# Altium PCB FPC-v4.0.PcbDoc
Units mil, origin at the board's own origin, x right, y up, seen from the top; angles counter-clockwise.
Board outline 1990.14 x 1043.31 mil, 2 copper layers (Top Layer, Bottom Layer); 1 components, 6 nets, 16 pads, 2 vias.
Unrouted connection lines stored in the file: 2.
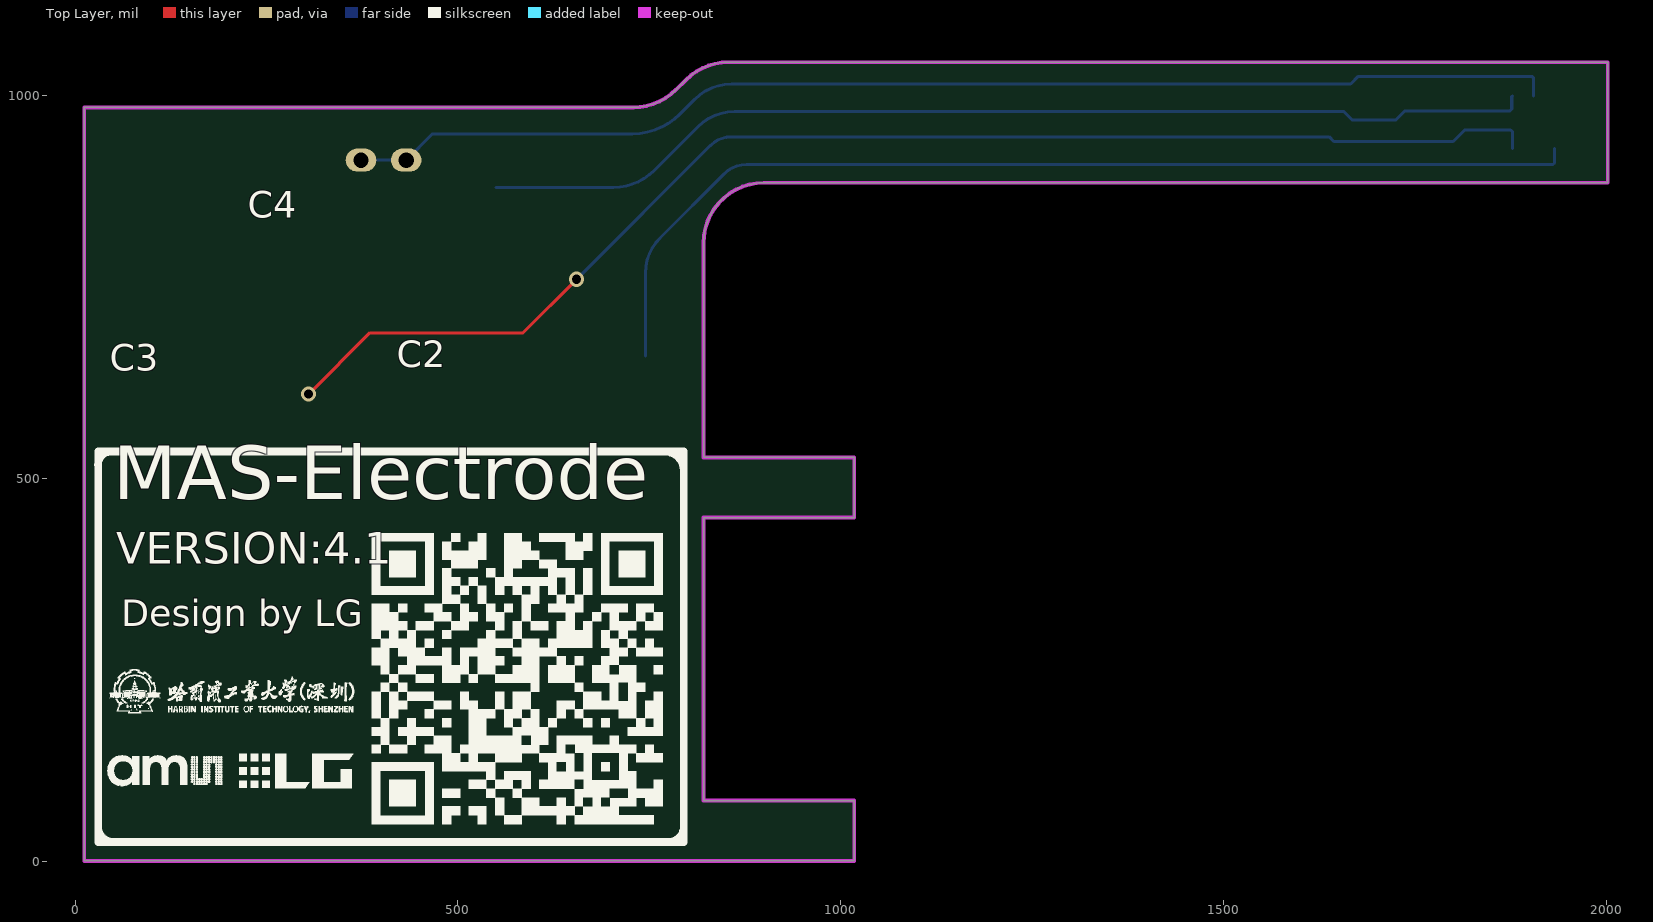
[diagram p0: Top Layer view]
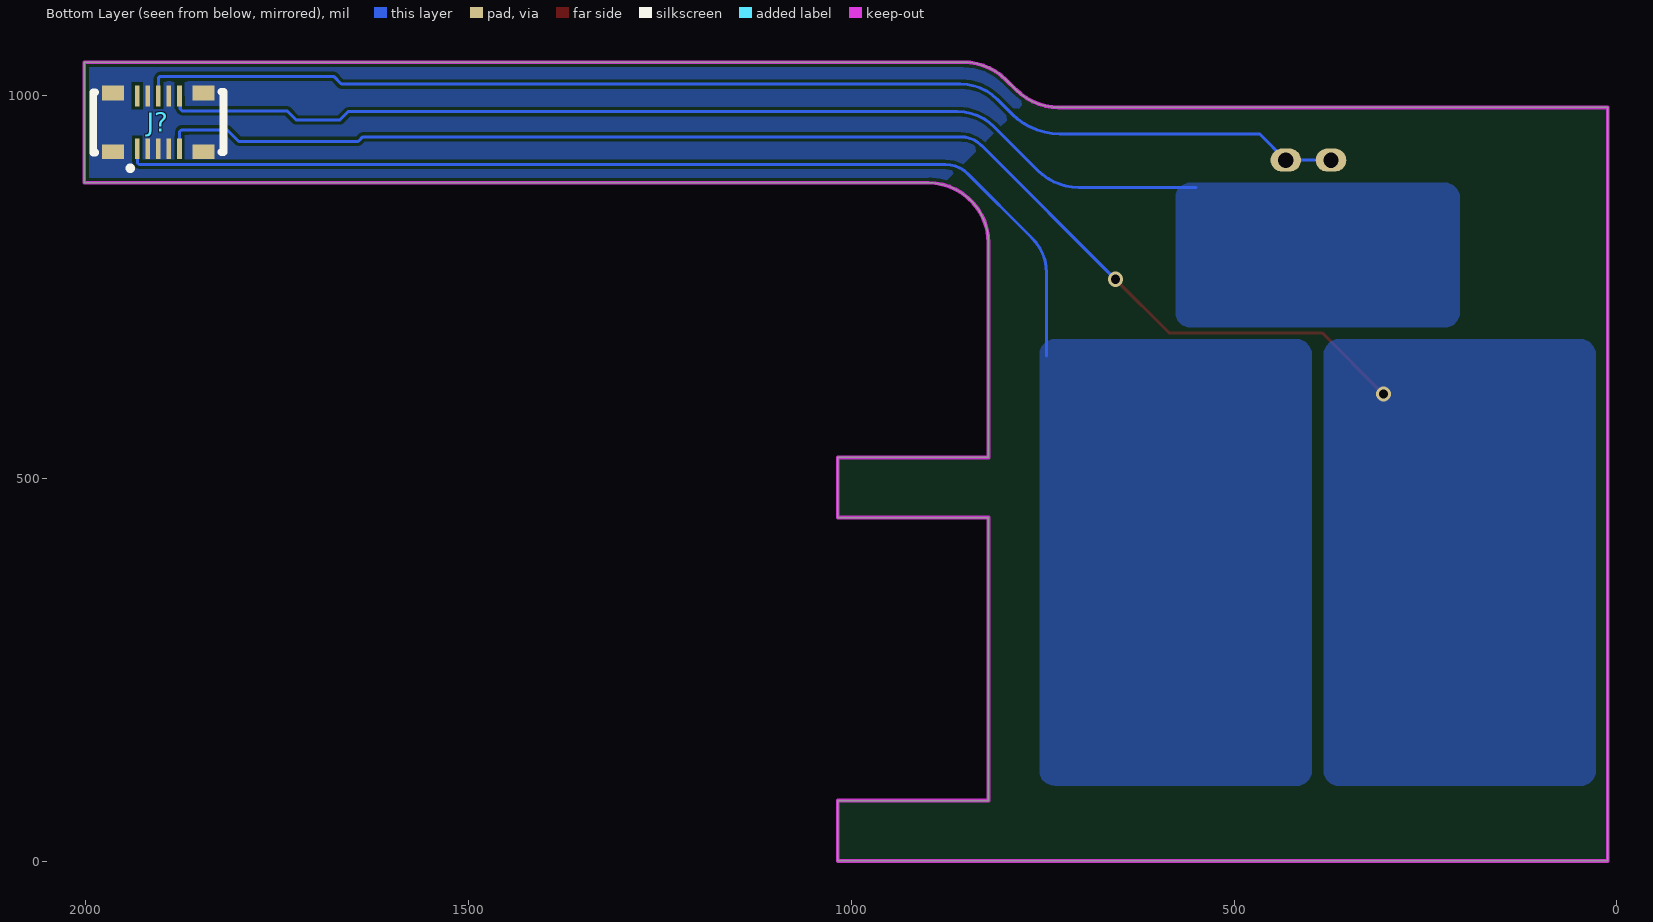
[diagram p1: Bottom Layer view, seen from below]

## Layer stack, top to bottom
Top Solder: solder mask 0.4, Solder Resist, Dk 3.5
Top Layer: signal copper 1.4
Dielectric 1: dielectric 12.6, FR-4, Dk 4.8
Bottom Layer: signal copper 1.4
Bottom Solder: solder mask 0.4, Solder Resist, Dk 3.5

## Board outline
11.81,0.25 1017.7,0.25 1017.7,78.99 820.85,78.99 820.85,448.65 1017.7,448.65 1017.7,527.39 820.85,527.39 820.85,807.34 cw(c899.59,807.34) 899.59,886.08 2001.95,886.08 2001.95,1043.56 853.47,1043.56 ccw(c853.47,964.82) 797.79,1020.49 784.86,1007.56 cw(c729.18,1063.24) 729.18,984.5 11.81,984.5

## Design rules (kind name [scope] priority, off if disabled: settings)
Clearance [All] p1: gap=4 ignorepadtopadclearanceinfootprint=FALSE except(6: Arc-THPad Track-THPad SMDPad-THPad THPad-THPad THPad-Fill THPad-Poly THPad-Region)
PlaneConnect [All] p1: planeconnectstyle=Direct reliefexpansion=20 reliefentries=4 reliefconductorwidth=10 reliefairgap=10
PolygonConnect [All] p1: connectstyle=Direct reliefconductorwidth=10 reliefentries=4 polygonreliefangle="90 Angle" airgapwidth=10
RoutingVias [All] p1: holewidth=11.81 width=19.68 viastyle="Through Hole" minholewidth=11.81 minwidth=19.68 maxholewidth=11.81 maxwidth=19.68
SolderMaskExpansion [All] p1: expansion=4 istentingtop=FALSE
Width [All] p1: maxlimit=10 minlimit=3 preferedwidth=4
29 further rules are at their usual default settings.

## Components (designator, comment, footprint, x,y, rotation, side; value= is the part's Value field where it differs from the comment)
J? "BM24-10DP/2-0.35V(51)" CONN-SMD_BM24-10DP-2-0.35V-51 1905,965 r180 bottom

## Footprints (in the part's own frame and the unit in brackets; to place one, negate y for a bottom-side part, rotate by r counter-clockwise, add the part's x,y. Pads: shape width x height; smd on the part's side, far side on the other; paste and mask are expansions set on the pad)
CONN-SMD_BM24-10DP-2-0.35V-51 [mm] "板对板连接器"
  rect 0.15x0.69 smd: 1(-0.7,-0.875) 2(-0.35,-0.875) 3(0,-0.875) 4(0.35,-0.875) 5(0.7,-0.875) 6(0.7,0.875) 7(0.35,0.875) 8(0,0.875) 9(-0.35,0.875) 10(-0.7,0.875)
  rect 0.73x0.49 smd: 11(1.5,0.975) 12(1.5,-0.975) 13(-1.5,-0.975) 14(-1.5,0.975)
  silkscreen extent -2.16,-1.55 2.16,1.02, body extent -2.17,-1 2.15,1.02, height 0.64

## Part data
J?: "板对板连接器", Current Rating (Max)=5A, JLCPCB Part Class="Extended Part", LCSC Part Name=BTB板对板,BM24系列,0.35间距,10PIN公座, Manufacturer=HRS(广濑), Operating Temperature Range=-40℃~+85℃, Add into BOM=yes, Convert to PCB=yes, Device=BM24-10DP/2-0.35V(51), Gender=公, Manufacturer Part=BM24-10DP/2-0.35V(51), Mounting Style=立贴, Name=BM24-10DP/2-0.35V(51), Number of Pins=10, Number of Rows=2, Pitch=0.35mm, Supplier=LCSC, Supplier Footprint=SMD,P=0.35mm, Supplier Part=C424554, Symbol=BM24-10DP/2-0.35V(51)

## Free pads (board coordinates)
  oval 40x30 hole 20: 1(373.4,915.6) 1(432.46,915.6)

## Via types
v1: diameter 19.68, hole 11.81, Top Layer to Bottom Layer, tented both sides, 2 vias

## Nets (pads, with @x,y where several pads share a name; then routed paths per layer and width w, separated by ;. In a path a pad name is that pad's centre, name@x,y a point inside that pad or via, vN(x,y) a via of type N, cw(c..) or ccw(c..) an arc to the next point about the centre after c; other vN are vias at no path point)
C1: J?.10
C2: J?.1 | length 1384.8
  Bottom Layer w4: 745,660 745,768.13 cw(c809.87,768.13) 764,814 847.98,897.98 cw(c877,868.96) 877,910 1930.21,910 1932.56,912.34 J?.1
C3: J?.5 | length 1741.7
  Top Layer w4: v1(305,610) 385,690 585,690 v1(655,760)
  Bottom Layer w4: v1(655,760) 829.65,934.65 cw(c857.05,907.24) 857.05,946 1638,946 1644,940 1800,940 1815,955 1875.09,955 1877.43,952.66 J?.5
C4: J?.6 | length 1389.4
  Bottom Layer w4: 550,880 703.2,880 ccw(c703.2,954.8) 756.08,901.89 813.52,959.34 cw(c861,911.85) 861,979 1657,979 1668,968 1725,968 1737,980 1874.14,980 1876.48,982.34 1876.48,998.5 J?.6
GND: J?.8 pad.1 | length 1594.4
  Bottom Layer w4: pad.1@373.4,915.6 432.46,915.6 466.85,950 728,950 ccw(c728,1037.36) 789.74,975.56 ; 789.77,975.59 809.48,995.29 cw(c857.05,947.72) 857.05,1015 1666,1015 1676,1025 1902.65,1025 1904.99,1022.66 J?.8
GP: J?.2 J?.3 J?.4 J?.7 J?.9 J?.11 J?.12 J?.13 J?.14

## Polygon pours and split planes (outlines as drawn)
GP on Bottom Layer "NONET_L01_P-001" (solid, pour order 11): 2003,885 2005,887 2005,1048 820,1048 768.15,996.15 877.3,887 960,887
C2 on Bottom Layer "NONET_L01_P-001" (solid, pour order 5): 398.61,118.36 398.61,661.67 cw(c418.3,661.67) 418.3,681.35 734.24,681.35 cw(c734.24,661.67) 753.92,661.67 753.92,118.36 cw(c734.24,118.36) 734.24,98.68 418.3,98.68 cw(c418.3,118.36)
C3 on Bottom Layer "NONET_L01_P-001" (solid, pour order 4): 47.24,98.68 cw(c47.24,118.36) 27.56,118.36 27.56,661.67 cw(c47.24,661.67) 47.24,681.35 363.18,681.35 cw(c363.18,661.67) 382.87,661.67 382.87,118.36 cw(c363.18,118.36) 363.18,98.68
C4 on Bottom Layer "NONET_L01_P-001" (solid, pour order 3): 224.9,697.1 cw(c224.9,716.79) 205.21,716.79 205.21,866.39 cw(c224.9,866.39) 224.9,886.08 556.58,886.08 cw(c556.58,866.39) 576.27,866.39 576.27,716.79 cw(c556.58,716.79) 556.58,697.1

## Keep-outs
Keep-Out Layer:
  lines w5: 11.81,0.25 820.85,0.25 1017.7,0.25 1017.7,78.99 820.85,78.99 820.85,448.65 1017.7,448.65 1017.7,527.39 820.85,527.39 820.85,807.34 cw(c899.59,807.34) 899.59,886.08 1844.47,886.08 2001.95,886.08 2001.95,1043.56 1844.47,1043.56 853.47,1043.56 ccw(c853.47,964.82) 797.79,1020.49 784.86,1007.56 cw(c729.18,1063.24) 729.18,984.5 663.37,984.5 11.81,984.5 11.81,0.25

## Silkscreen, mask and mechanical layers (free items; w line width, h text height)
Top Overlay:
  drawing of 444 lines, arcs and shapes, not listed
  text "C4" at 225.3,828.51 h60
  text "C2" at 420.3,633.51 h60
  text "C3" at 45.3,628.51 h60
  text "MAS-Electrode" at 50,450 h120
  text "VERSION:4.1" at 53.95,374.5 h70
  text "Design by LG" at 60,295.03 h60
Mechanical 1:
  lines w0.5: 11.81,0.25 820.85,0.25 1017.7,0.25 1017.7,78.99 820.85,78.99 820.85,448.65 1017.7,448.65 1017.7,527.39 820.85,527.39 820.85,807.34 cw(c899.59,807.34) 899.59,886.08 1844.47,886.08 2001.95,886.08 2001.95,1043.56 1844.47,1043.56 853.47,1043.56 ccw(c853.47,964.82) 797.79,1020.49 784.86,1007.56 cw(c729.18,1063.24) 729.18,984.5 663.37,984.5 11.81,984.5 11.81,0.25
  lines w10: 1805,886.08 2001.95,886.08 2001.95,1045 1805,1045 1805,886.08
  lines w15: 1925,1100 1925,1065 ; 1940,1075 1925,1065 ; 1925,1065 1910,1075 1925,1065
  text "1.客编放在底层" at 1750,1295.45 h60
  text "2.补强说明： / 焊盘位置框选区域顶层PI补强" at 1750,1145 h60